# EAGLE board untitled (EAGLE 7.7.0)
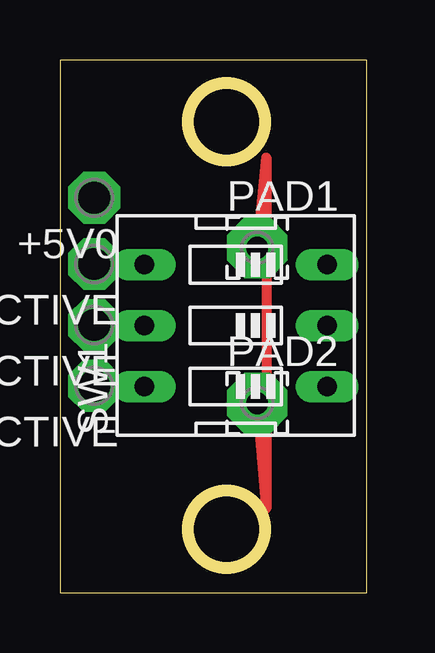
[diagram p0: board, top side]
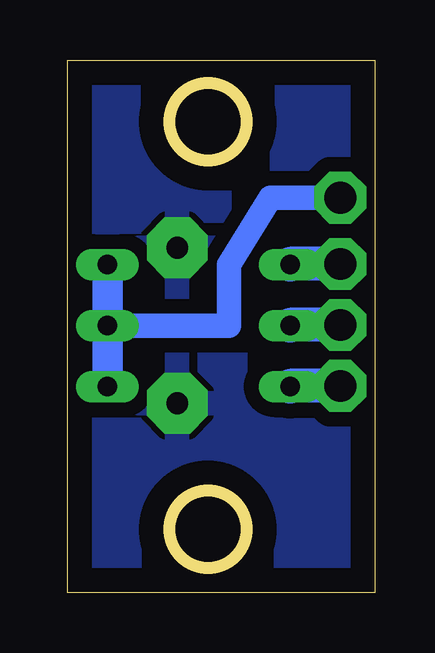
[diagram p1: board, bottom side, seen from below]

Size 12.81 x 22.2 mm. Coordinates in mm from the lower left corner, seen from the top.
Outline: 0,0 12.81,0 12.81,22.2 0,22.2 0,0
Outline: circle at 6.95,19.63 radius 1.6
Outline: circle at 6.95,2.64 radius 1.6
Copper layers (1*16): Top 0.035mm / dielectric 1.5mm / Bottom 0.035mm
Design rules "default": minimum track width 10mil, minimum drill 24mil, track to track 8mil, track to pad 8mil, pad to pad 8mil, via to via 8mil, smd to smd 8mil, copper to edge 40mil, drill to drill 8mil, minimum pad ring 10mil, minimum via ring 8mil, stop-mask expansion 4mil, vias tented up to drill 0mil, thermal gap 10mil

## Footprints (pad centres in the part's own frame; a part is rotated, then mirrored left to right if it is on the bottom)
P1-13 = drill 1.321 pad 2.159 octagon: TP 0,0
2,54/0,9 = drill 0.914 pad 2.54 octagon: 1 0,0
EDG-03 = drill 0.813 long: 1 -2.54,-3.81; 2 0,-3.81; 3 2.54,-3.81; 4 2.54,3.81; 5 0,3.81; 6 -2.54,3.81

## Placement (x,y rotation side)
+5V0  TPPAD1-13  [P1-13]  1.43,16.46 180 top
IS_DAB_ANT_ACTIVE  TPPAD1-13  [P1-13]  1.43,11.16 180 top
IS_FM_ANT_ACTIVE  TPPAD1-13  [P1-13]  1.43,8.62 180 top
IS_FM_DAB_CONVERTER_ACTIVE  TPPAD1-13  [P1-13]  1.43,13.7 180 top
PAD1  WIREPAD2,54/0,9  [2,54/0,9]  8.23,14.38 0 top
PAD2  WIREPAD2,54/0,9  [2,54/0,9]  8.23,7.91 0 top
SW1  [EDG-03]  7.33,11.13 90 top

## Library data of the parts
+5V0 IS_DAB_ANT_ACTIVE IS_FM_ANT_ACTIVE IS_FM_DAB_CONVERTER_ACTIVE = testpad
PAD1 PAD2 = wirepad
SW1 = special

## Nets
N$1: +5V0.TP SW1.1 SW1.2 SW1.3
N$2: IS_FM_ANT_ACTIVE.TP SW1.6
N$3: IS_DAB_ANT_ACTIVE.TP SW1.5
N$4: IS_FM_DAB_CONVERTER_ACTIVE.TP SW1.4
STRUCTURAL_REINFORCEMENT: PAD1.1 PAD2.1

## Tracks (layer width: path | path; a pad name or v marks a point on that pad's centre or on a via)
N$1
  Bottom 1.016: +5V0.TP 4.35,16.46 6.06,13.67 6.06,11.13 SW1.2
  Bottom 1.27: SW1.3 SW1.2 SW1.1
N$2
  Bottom 1.422: IS_FM_ANT_ACTIVE.TP 3.52,8.62 SW1.6
N$3
  Bottom 1.422: IS_DAB_ANT_ACTIVE.TP 3.52,11.16 SW1.5
N$4
  Bottom 1.422: IS_FM_DAB_CONVERTER_ACTIVE.TP 3.52,13.7 SW1.4
STRUCTURAL_REINFORCEMENT
  Top 0.406: PAD1.1 8.6,18.15 8.6,3.51 PAD2.1
  pour Bottom (isolate 0.61): -1.17,23.16 13.68,23.16 13.68,-0.97 -1.17,-0.97